# Altium PCB LM-CT-001.PcbDoc
Units mm, origin at the board's own origin, x right, y up, seen from the top; angles counter-clockwise.
Board outline 15 x 52.8 mm, 5 copper layers (Top Layer, Guard, +5, GND, Bottom Layer), stack 0.941 mm thick; 51 components, 43 nets, 200 pads, 13 vias.
Unrouted connection lines stored in the file: 86.
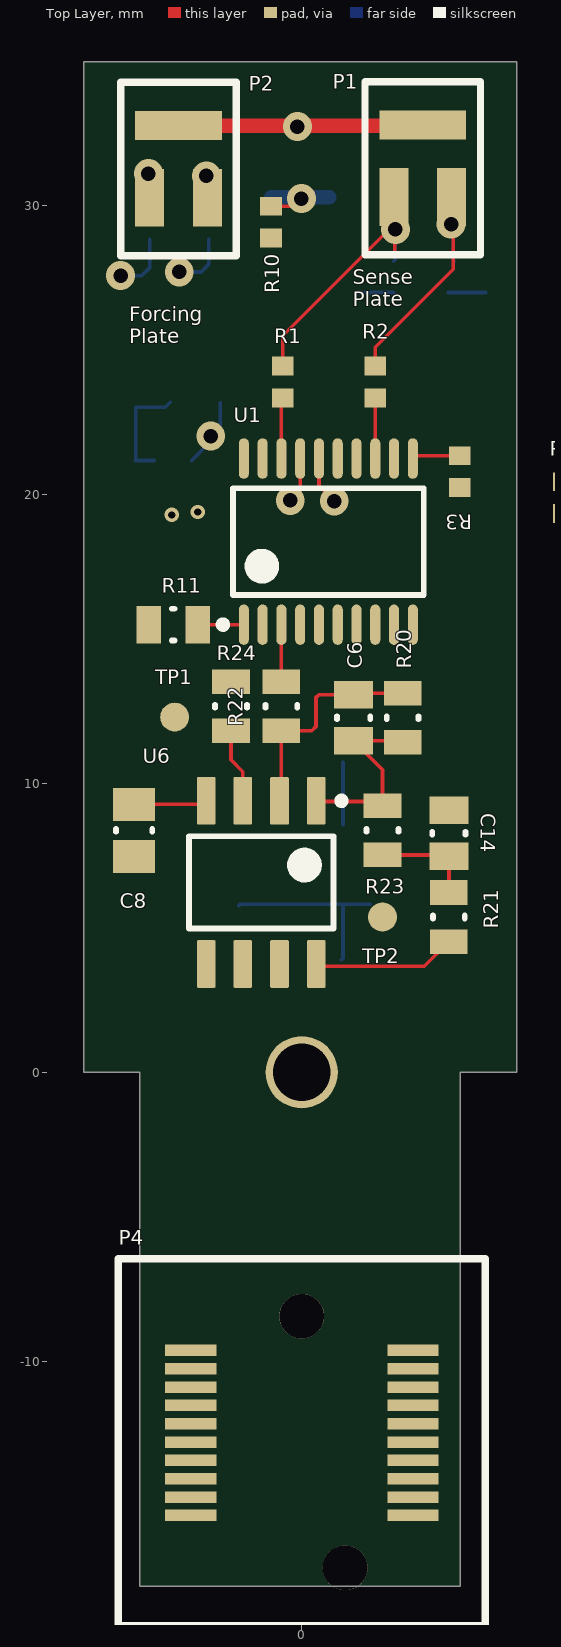
[diagram p0: Top Layer view]
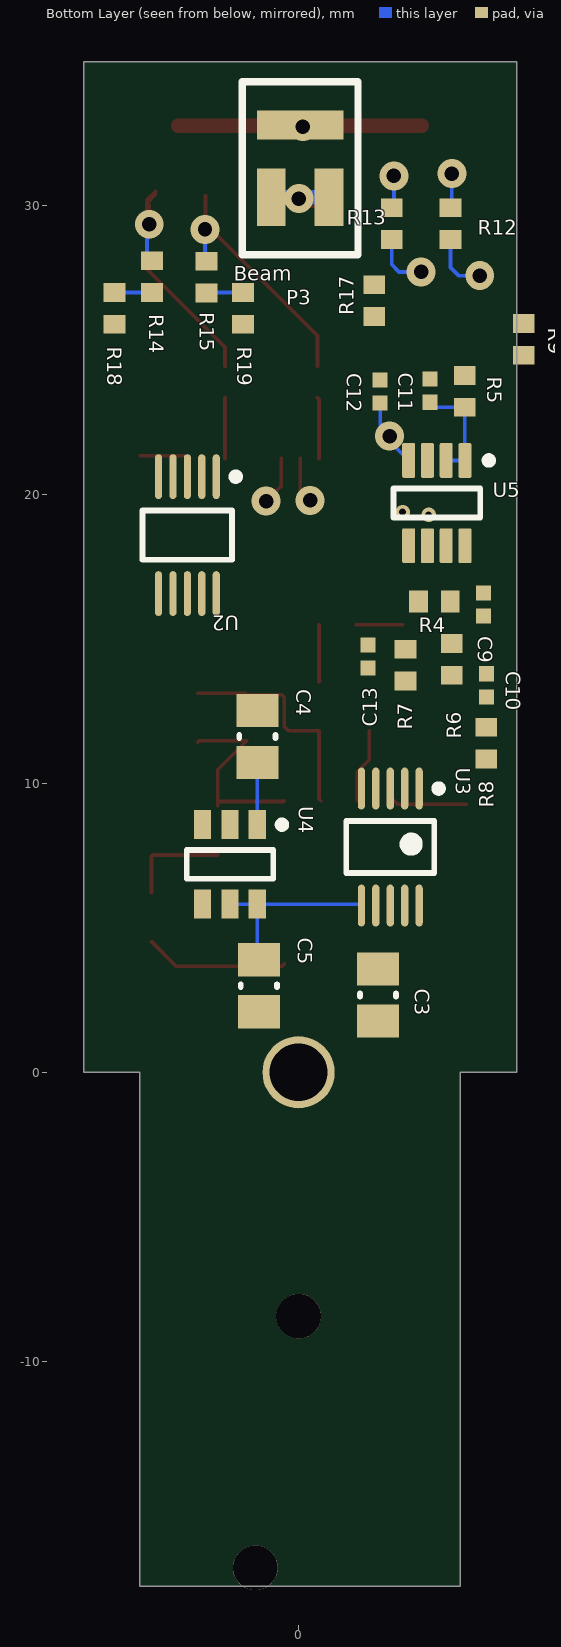
[diagram p1: Bottom Layer view, seen from below]
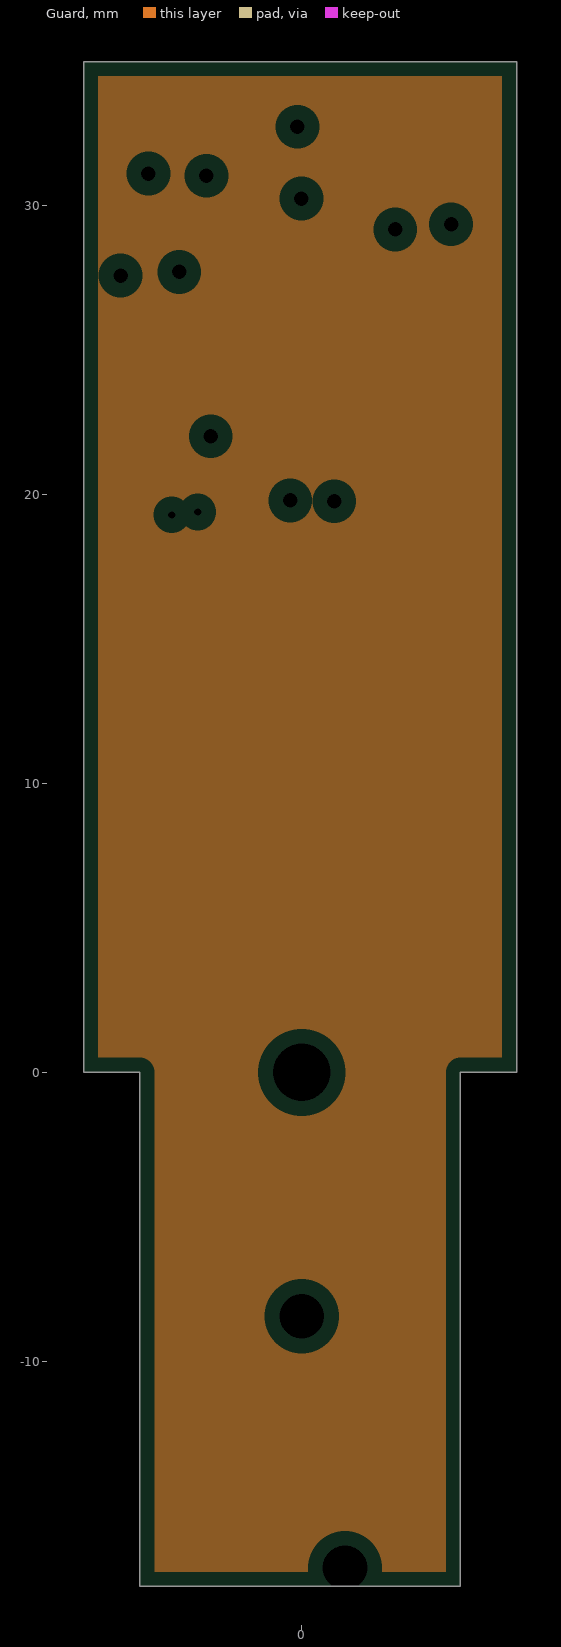
[diagram p2: Guard, clearances drawn from the general rule]
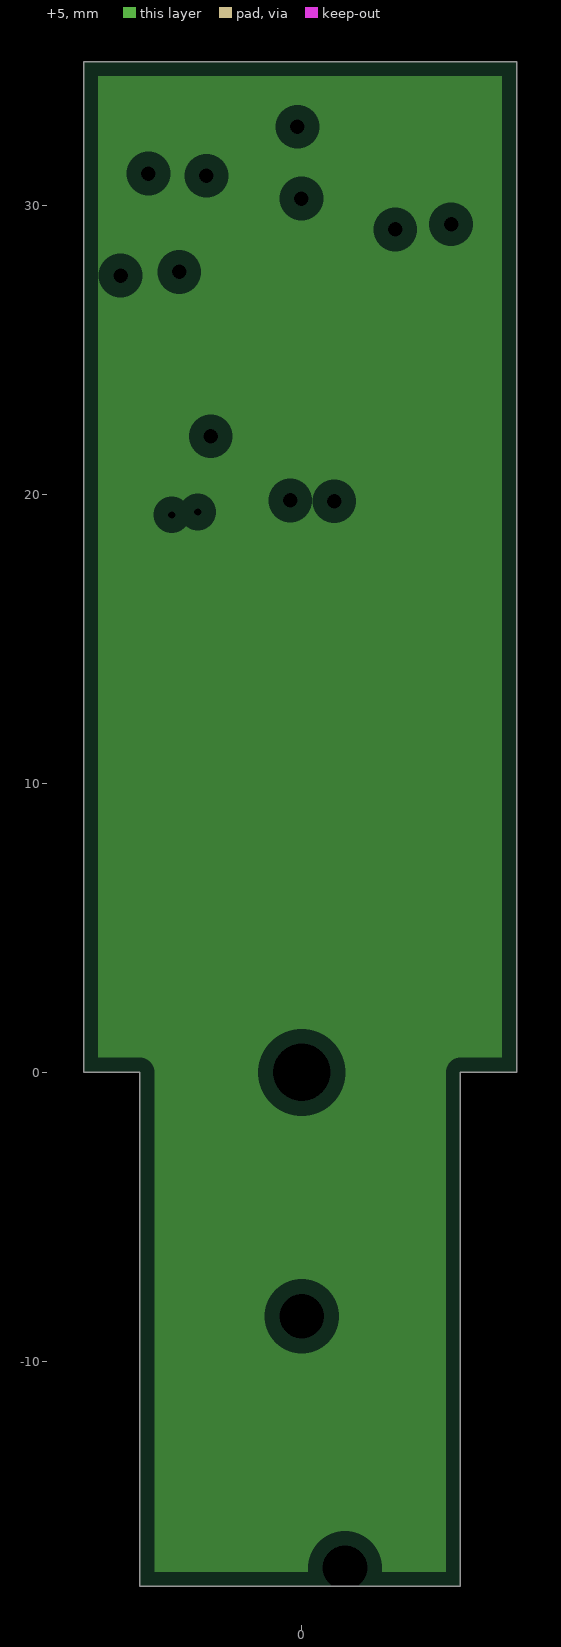
[diagram p3: +5, clearances drawn from the general rule]
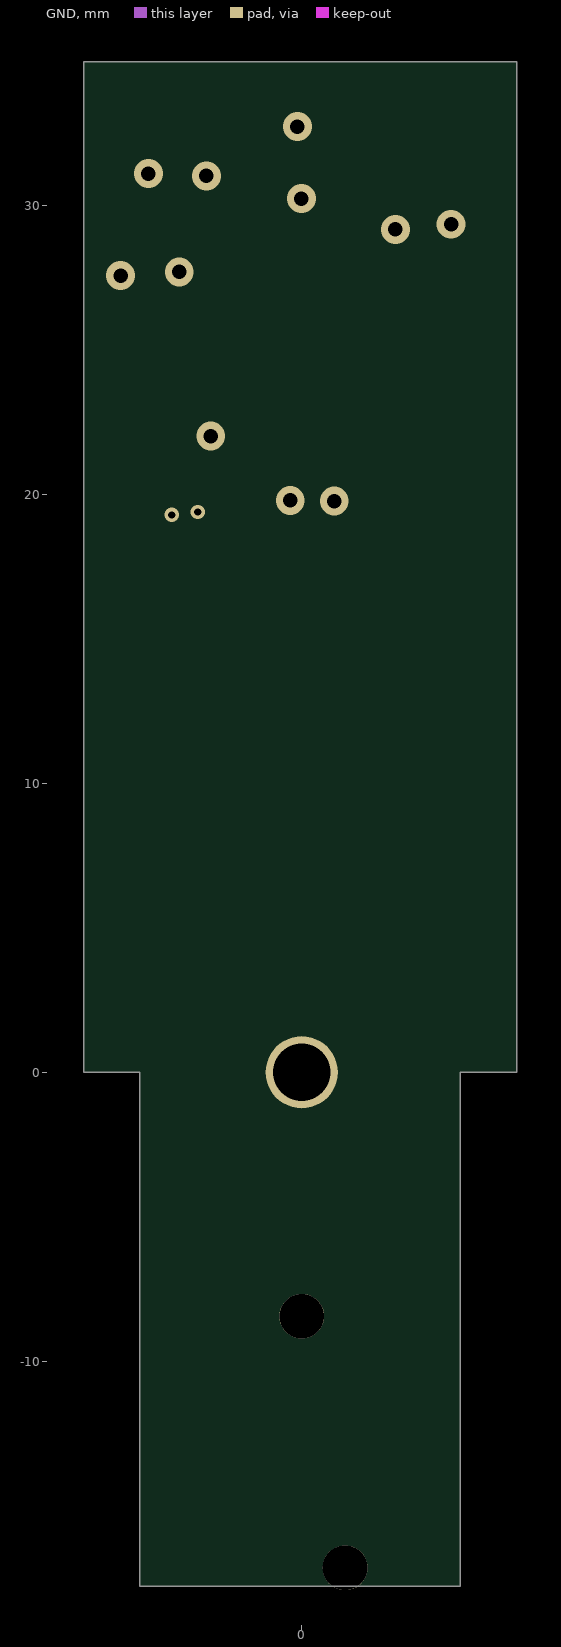
[diagram p4: GND]

## Layer stack, top to bottom
Top Solder: solder mask 0.0102, Solder Resist, Dk 3.5
Top Layer: signal copper 0.0356
Dielectric 1: core 0.254, FR-4, Dk 4.2
Guard: plane copper 0.036
Dielectric 4: prepreg 0.127, Dk 4.2
+5: plane copper 0.036, net +5
Dielectric 3: core 0.254, Dk 4.2
GND: signal copper 0.036
Dielectric 2: prepreg 0.127, Dk 4.2
Bottom Layer: signal copper 0.0356
Bottom Solder: solder mask 0.0102, Solder Resist, Dk 3.5

## Board outline
7.444,0.001 5.494,0.001 5.494,-17.8 -5.606,-17.8 -5.606,0.001 -7.556,0.001 -7.556,34.996 7.444,34.996

## Design rules (kind name [scope] priority, off if disabled: settings)
Clearance [All] p1: gap=0.127 ignorepadtopadclearanceinfootprint=FALSE except(0: Arc-Hole Track-Hole SMDPad-Hole THPad-Hole Via-Hole Fill-Hole Poly-Hole Region-Hole Text-Hole)
HoleToHoleClearance [All] p1: gap=0.127 allowstackedmicrovias=TRUE
MinimumSolderMaskSliver [All] p1: minsoldermaskwidth=0.127
PlaneClearance [All] p1: clearance=0.508
PlaneConnect [All] p1: planeconnectstyle=Relief reliefexpansion=0.508 reliefentries=4 reliefconductorwidth=0.254 reliefairgap=0.254
PolygonConnect [All] p1: connectstyle=Relief reliefconductorwidth=0.254 reliefentries=4 polygonreliefangle="90 Angle" airgapwidth=0.254
RoutingVias [All] p1: holewidth=0.254 width=0.508 viastyle="Through Hole" minholewidth=0.127 minwidth=0.254 maxholewidth=0.711 maxwidth=1.27
SilkToSolderMaskClearance [IsPad] p1: minsilkscreentomaskgap=0.127 clearancetoexposedcopper=TRUE
SolderMaskExpansion [All] p1: expansion=0.102
Width [All] p1: maxlimit=0.254 minlimit=0.127 preferedwidth=0.254 toplayer_prefwidth=0.127 bottomlayer_prefwidth=0.127 minimp=50.000000 maximp=50.000000 favimp=50.000000
25 further rules are at their usual default settings.

## Classes and differential pairs
component class Beam_Amp: C9 C10 C11 C12 C13 P1 P2 P3 P4 R1 R2 R3 R4 R5 R6 R7 R8 R9 R10 R11 TP1 U1 U5
component class ADC: C1 C2 C3 C4 C5 R12 R13 R14 R15 R16 R17 R18 R19 U2 U3 U4
component class Synch_Demod: C6 C7 C8 C14 R20 R21 R22 R23 R24 TP2 U6

## Components (designator, comment, footprint, x,y, rotation, side; value= is the part's Value field where it differs from the comment)
"32 Bit ADC" "Comment" TSSOP-28_M -14.884,10.744 r0 bottom
C1 "CAP CER 0.1UF 25V X7R 0805" CAPC0805(2012)145_N 10.7,11.1 r0 top
C2 "CAP CER 0.1UF 25V X7R 0805" CAPC0805(2012)145_N 10.7,14.2 r0 top
C3 "CAP CER 0.1UF 25V X7R 0805" CAPC0805(2012)145_N -2.75,2.675 r270 bottom
C4 "CAP CER 0.1UF 25V X7R 0805" CAPC0805(2012)145_N 1.425,11.625 r270 bottom
C5 "CAP CER 0.1UF 25V X7R 0805" CAPC0805(2012)145_N 1.375,3 r270 bottom
C6 "470nF" CAPC0805(2012)75_L 1.794,12.276 r270 top
C7 "CAP CER 0.1UF 25V X7R 0805" CAPC0805(2012)145_N 10.7,7.9 r0 top
C8 "CAP CER 0.1UF 25V X7R 0805" CAPC0805(2012)145_N -5.806,8.376 r270 top
C9 "0.1uF" CAPC0402(1005)60_L -6.4,16.2 r90 bottom
C10 "0.1uF" CAPC0402(1005)60_L -6.5,13.4 r270 bottom
C11 "0.1uF" CAPC0402(1005)60_L -4.55,23.6 r90 bottom
C12 "0.1uF" CAPC0402(1005)60_L -2.825,23.575 r270 bottom
C13 "1uF" CAPC0402(1005)60_L -2.4,14.4 r90 bottom
C14 "22uF" CAPC0805(2012)75_L 5.094,8.276 r270 top
P1 "Triax_Conn" Triax_Conn 3.189,30.302 r0 top
P2 "Triax_Conn" Triax_Conn -5.27,30.277 r0 top
P3 "Triax_Conn" Triax_Conn 0.944,30.301 r180 bottom
P4 "MEC6-110-0-PCB" MEC6-110-02-L-DV 0,-12.8 r90 top
R1 "100k" RESC0402(1005)_M -0.656,23.901 r270 top
R2 "100k" RESC0402(1005)_M 2.544,23.901 r270 top
R3 "3.9K" RESC0402(1005)_M 5.475,20.8 r90 top
R4 "" RESC0402(1005)_M -4.7,16.3 r0 bottom
R5 "100" RESC0402(1005)_M -5.75,23.575 r90 bottom
R6 "" RESC0402(1005)_M -5.3,14.3 r90 bottom
R7 "" RESC0402(1005)_M -3.7,14.1 r270 bottom
R8 "" RESC0402(1005)_M -6.5,11.4 r270 bottom
R9 "" RESC0402(1005)_M -7.8,25.375 r90 bottom
R10 "" RESC0402(1005)_M -1.067,29.439 r90 top
R11 "0" RESC0805(2012)_L -4.456,15.501 r0 top
R12 "100K" RESC0402(1005)_M -5.258,29.388 r90 bottom
R13 "100K" RESC0402(1005)_M -3.226,29.388 r90 bottom
R14 "100K" RESC0402(1005)_M 5.075,27.55 r90 bottom
R15 "100K" RESC0402(1005)_M 3.189,27.534 r90 bottom
R16 "10K" RESC0402(1005)_M 9.075,19.9 r90 top
R17 "10K" RESC0402(1005)_M -2.616,26.721 r90 bottom
R18 "10K" RESC0402(1005)_M 6.375,26.45 r90 bottom
R19 "10K" RESC0402(1005)_M 1.925,26.45 r90 bottom
R20 "300K" RESC0805(2012)_L 3.494,12.276 r90 top
R21 "499K" RESC0805(2012)_L 5.094,5.376 r270 top
R22 "18.2K" RESC0805(2012)_L -0.706,12.676 r90 top
R23 "249K" RESC0805(2012)_L 2.794,8.376 r90 top
R24 "33K" RESC0805(2012)_L -2.45,12.675 r270 top
TP1 "TP-SM-C-100" TP-SM-C-100 -4.4,12.3 r0 top
TP2 "TP-SM-C-100" TP-SM-C-100 2.794,5.376 r90 top
U1 "MAX333CWP+" TSOP65P640X90-20N 0.919,18.376 r90 top
U2 "ADG704BRMZ" ADI-RM-10_L 3.85,18.6 r270 bottom
U3 "MAX11100EUB+T" U10+2_L -3.175,7.8 r270 bottom
U4 "MAX6070AAUT41+T" SOT95P280X445-6N 2.375,7.2 r270 bottom
U5 "OPA2378AIDCNT" DCN0008A_M -4.787,19.71 r270 bottom
U6 "LPC662AIM" D0008A_M -1.406,6.576 r270 top

## Footprints (in the part's own frame and the unit in brackets; to place one, negate y for a bottom-side part, rotate by r counter-clockwise, add the part's x,y. Pads: shape width x height; smd on the part's side, far side on the other; paste and mask are expansions set on the pad)
ADI-RM-10_L [mm] "SOP, 10-Leads, Body 3x3mm, Pitch 0.5mm, IPC High Density"
  oval 1.55x0.25 smd: 1(-2.025,1) 2(-2.025,0.5) 3(-2.025,0) 4(-2.025,-0.5) 5(-2.025,-1) 6(2.025,-1) 7(2.025,-0.5) 8(2.025,0) 9(2.025,0.5) 10(2.025,1)
  silkscreen extent -2.15,-1.55 0.85,1.8, body extent -1.55,-1.55 1.55,1.55, height 1.1
CAPC0402(1005)60_L [mm] "Chip Capacitor, Body 1.0x0.5mm, Height 0.6mm, IPC High Density"
  rect 0.52x0.52 smd: 1(-0.4,0) 2(0.4,0)
  body extent -0.55,-0.3 0.55,0.3, height 0.6
CAPC0805(2012)75_L [mm] "Chip Capacitor, Body 2.0x1.2mm, Height 0.75mm, IPC High Density"
  rect 0.95x1.35 smd: 1(-0.8,0) 2(0.8,0)
  silkscreen extent -0.05,-0.58 0.05,0.58, body extent -1.1,-0.72 1.1,0.72, height 0.75
CAPC0805(2012)145_N [mm] "Chip Capacitor, Body 2.0x1.2mm, Height 1.45mm, IPC Medium Density"
  rect 1.15x1.45 smd: 1(-0.9,0) 2(0.9,0)
  silkscreen extent -0.05,-0.62 0.05,0.63, body extent -1.1,-0.72 1.1,0.73, height 1.45
D0008A_M [mm] "SOIC, 8-Leads, Body 5x4mm, Pitch 1.27mm, IPC Low Density"
  rrect15% 1.65x0.65 smd: 1(-2.825,1.905) 2(-2.825,0.635) 3(-2.825,-0.635) 4(-2.825,-1.905) 5(2.825,-1.905) 6(2.825,-0.635) 7(2.825,0.635) 8(2.825,1.905)
  silkscreen extent -2.95,-2.5 1.6,2.91, body extent -3,-2.45 3,2.45, height 1.63
DCN0008A_M [mm] "SOT23, 8-Leads, Body 3x1.75mm, Pitch 0.65mm, IPC Low Density"
  rrect22% 1.2x0.45 smd: 1(-1.475,0.975) 2(-1.475,0.325) 3(-1.475,-0.325) 4(-1.475,-0.975) 5(1.475,-0.975) 6(1.475,-0.325) 7(1.475,0.325) 8(1.475,0.975)
  silkscreen extent -1.6,-1.5 0.5,1.92, body extent -0.88,-1.5 0.87,1.5, height 1.45
MEC6-110-02-L-DV [mm] "Edge Connector Socket"
  rect 0.399x1.781 smd: A1(-2.54,3.85) A2(-1.905,3.85) A3(-1.27,3.85) A4(-0.635,3.85) A5(0,3.85) A6(0.635,3.85) A7(1.27,3.85) A8(1.905,3.85) A9(2.54,3.85) A10(3.175,3.85) B1(-2.54,-3.85) B2(-1.905,-3.85) B3(-1.27,-3.85) B4(-0.635,-3.85) B5(0,-3.85) B6(0.635,-3.85) B7(1.27,-3.85) B8(1.905,-3.85) B9(2.54,-3.85) B10(3.175,-3.85)
  round 1.55 hole 1.55: ""(-4.356,-1.5) ""(4.356,0)
  silkscreen extent -6.35,-6.35 6.35,6.35, body extent -5.2,-4.39 5.92,4.41, height 8.5
RESC0402(1005)_M [mm] "Chip Resistor, Body 1.0x0.5mm, IPC Low Density"
  rect 0.65x0.75 smd: 1(-0.55,0) 2(0.55,0)
  body extent -0.52,-0.28 0.53,0.28, height 0.4
RESC0805(2012)_L [mm] "Chip Resistor, Body 2.0x1.3mm, IPC High Density"
  rect 0.85x1.3 smd: 1(-0.85,0) 2(0.85,0)
  silkscreen extent -0.05,-0.55 0.05,0.55, body extent -1.1,-0.67 1.1,0.68, height 0.7
SOT95P280X445-6N [mm] "SOT23, 6-Leads, Body 2.90x2.80mm, Pitch 0.95mm, IPC Medium Density"
  rect 1x0.6 smd: 1(-1.375,0.95) 2(-1.375,0) 3(-1.375,-0.95) 4(1.375,-0.95) 5(1.375,0) 6(1.375,0.95)
  silkscreen extent -1.5,-1.5 0.5,1.92, body extent -2.11,-1.78 2.11,1.73, height 1.08
TP-SM-C-100 [mm] "Test Point, Surface Mounting, Circular, Pad Diameter 1mm"
  round 1 smd: 1(0,0)
Triax_Conn [mm] "Triaxial pads for Conning Tower"
  rect 1x2 smd: 1(0,0) 2(2,0)
  rect 3x1 smd: 3(1,2.5)
  silkscreen extent -1,-2 3,4
TSOP65P640X90-20N [mm] "TSOP, 20-Leads, Body 6.50x4.40mm, Pitch 0.65mm, IPC Medium Density"
  oval 1.4x0.35 smd: 1(-2.875,2.925) 2(-2.875,2.275) 3(-2.875,1.625) 4(-2.875,0.975) 5(-2.875,0.325) 6(-2.875,-0.325) 7(-2.875,-0.975) 8(-2.875,-1.625) 9(-2.875,-2.275) 10(-2.875,-2.925) 11(2.875,-2.925) 12(2.875,-2.275) 13(2.875,-1.625) 14(2.875,-0.975) 15(2.875,-0.325) 16(2.875,0.325) 17(2.875,0.975) 18(2.875,1.625) 19(2.875,2.275) 20(2.875,2.925)
  silkscreen extent -3,-3.3 1.85,3.77, body extent -2.25,-3.3 2.25,3.3, height 0.9
TSSOP-28_M [mm] "SOP, 28-Leads, Body 9.7x4.4mm, Pitch 0.65mm, IPC Low Density"
  oval 2x0.35 smd: 1(-2.9,4.225) 2(-2.9,3.575) 3(-2.9,2.925) 4(-2.9,2.275) 5(-2.9,1.625) 6(-2.9,0.975) 7(-2.9,0.325) 8(-2.9,-0.325) 9(-2.9,-0.975) 10(-2.9,-1.625) 11(-2.9,-2.275) 12(-2.9,-2.925) 13(-2.9,-3.575) 14(-2.9,-4.225) 15(2.9,-4.225) 16(2.9,-3.575) 17(2.9,-2.925) 18(2.9,-2.275) 19(2.9,-1.625) 20(2.9,-0.975) 21(2.9,-0.325) 22(2.9,0.325) 23(2.9,0.975) 24(2.9,1.625) 25(2.9,2.275) 26(2.9,2.925) 27(2.9,3.575) 28(2.9,4.225)
  silkscreen extent -3.02,-4.9 1.5,5.07, body extent -2.25,-4.9 2.25,4.9, height 1.2
U10+2_L [mm] "TSSOP, 10-Leads, Body 3x3mm, Pitch 0.5mm, IPC High Density"
  oval 1.45x0.25 smd: 1(-2.025,1) 2(-2.025,0.5) 3(-2.025,0) 4(-2.025,-0.5) 5(-2.025,-1) 6(2.025,-1) 7(2.025,-0.5) 8(2.025,0) 9(2.025,0.5) 10(2.025,1)
  silkscreen extent -2.15,-1.52 0.9,1.8, body extent -1.55,-1.55 1.55,1.55, height 1.1

## Part data
C1 C2 C3 C4 C5 C7 C8: library part CMP-1036-04795-1, Capacitance=0.1µF, Manufacturer="Murata Electronics North America", Manufacturer Part Number=GRM21BR71E104KA01L, Operating Temperature="-55°C ~ 125°C", Package / Case="0805 (2012 Metric)", Ratings=-, Supplier Part Number 1=490-1673-6-ND, Temperature Coefficient=X7R, Tolerance=±10%, Voltage - Rated=25V, Applications="General Purpose", Category=Capacitors, ComponentLink1Description=http://www.murata.com/~/media/webrenewal/support/library/catalog/products/capacitor/mlcc/c02e.ashx, ComponentLink1URL=http://www.murata.com/~/media/webrenewal/support/library/catalog/products/capacitor/mlcc/c02e.ashx, Features=-, Height - Seated (Max)=-, Lead Spacing=-, Lead Style=-, Mounting Type="Surface Mount, MLCC", Packaging=Digi-Reel®, Part Status=Active, Pricing 1="1=0.2, 10=0.145, 100=0.0683, 500=0.04788, 1000=0.03964 (USD)", RoHS="RoHS Compliant", Size / Dimension="0.079\" L x 0.049\" W (2.00mm x 1.25mm)", Stock 1=891652, Supplier 1=Digi-Key, Thickness (Max)="0.053\" (1.35mm)"
C6: library part CMP-1036-02117-1, "CAP CER 0.47UF 25V X7R 0805", Manufacturer="Murata Electronics North America", Manufacturer Part Number=GRM219R71E474KA88D, Operating Temperature="-55°C ~ 125°C", Package / Case="0805 (2012 Metric)", Ratings=-, Supplier Part Number 1=490-11584-1-ND, Temperature Coefficient=X7R, Tolerance=±10%, Voltage - Rated=25V, Applications="General Purpose", Category=Capacitors, ComponentLink1Description=https://www.murata.com/~/media/webrenewal/support/library/catalog/products/capacitor/mlcc/c02e.ashx?la=en-us, ComponentLink1URL=https://www.murata.com/~/media/webrenewal/support/library/catalog/products/capacitor/mlcc/c02e.ashx?la=en-us, Features=-, Height - Seated (Max)=-, Lead Spacing=-, Lead Style=-, Mounting Type="Surface Mount, MLCC", Packaging="Cut Tape (CT)", Part Status=Active, Pricing 1="1=0.38, 10=0.262, 100=0.1573, 500=0.118, 1000=0.09964 (USD)", RoHS="RoHS Compliant", Size / Dimension="0.079\" L x 0.049\" W (2.00mm x 1.25mm)", Stock 1=410, Supplier 1=Digi-Key, Thickness (Max)="0.037\" (0.95mm)"
C9 C10 C11 C12 C13: library part CMP-1034-00252-1, "CAP CER 0.1UF 10V X7R 0402", Manufacturer="Murata Electronics North America", Manufacturer Part Number=GRM155R71A104KA01D, Operating Temperature="-55°C ~ 125°C", Package / Case="0402 (1005 Metric)", Ratings=-, Supplier Part Number 1=490-6321-1-ND, Temperature Coefficient=X7R, Tolerance=±10%, Voltage - Rated=10V, Applications="General Purpose", Category=Capacitors, ComponentLink1Description=http://www.murata.com/~/media/webrenewal/support/library/catalog/products/capacitor/mlcc/c02e.ashx?la=en-us, ComponentLink1URL=http://www.murata.com/~/media/webrenewal/support/library/catalog/products/capacitor/mlcc/c02e.ashx?la=en-us, Features=-, Height - Seated (Max)=-, Lead Spacing=-, Mounting Type="Surface Mount, MLCC", Packaging="Cut Tape (CT)", Part Status=Active, Pricing 1="1=0.1, 10=0.014, 100=0.0063, 500=0.00446, 1000=0.00351, 2500=0.00319, 5000=0.00293 (USD)", RoHS="RoHS Compliant", Size / Dimension="0.039\" L x 0.020\" W (1.00mm x 0.50mm)", Stock 1=2920395, Supplier 1=Digi-Key, Thickness (Max)="0.022\" (0.55mm)"
C14: library part CMP-1036-02117-1, "CAP CER 22UF 25V X5R 0805", Manufacturer="Murata Electronics North America", Manufacturer Part Number=GRM21BR61E226ME44L, Operating Temperature="-55°C ~ 85°C", Package / Case="0805 (2012 Metric)", Ratings=-, Supplier Part Number 1=490-10749-1-ND, Temperature Coefficient=X5R, Tolerance=±20%, Voltage - Rated=25V, Applications="General Purpose", Category=Capacitors, ComponentLink1Description=http://search.murata.co.jp/Ceramy/image/img/A01X/G101/ENG/GRM21BR61E226ME44-01.pdf, ComponentLink1URL=http://search.murata.co.jp/Ceramy/image/img/A01X/G101/ENG/GRM21BR61E226ME44-01.pdf, Features=-, Height - Seated (Max)=-, Lead Spacing=-, Lead Style=-, Mounting Type="Surface Mount, MLCC", Notification="Current market demand for these product types have resulted in fluctuating and extending lead times. Lead times may differ.", Packaging="Cut Tape (CT)", Part Status=Active, Pricing 1="1=0.57, 10=0.404, 100=0.2663, 500=0.19722, 1000=0.16764 (USD)", RoHS="RoHS Compliant", Size / Dimension="0.079\" L x 0.049\" W (2.00mm x 1.25mm)", Stock 1=2004, Supplier 1=Digi-Key, Thickness (Max)="0.057\" (1.45mm)"
R1 R2: library part CMP-1011-00651-1
R3 R4 R5 R6 R7 R8 R9 R10 R12 R13 R14 R15 R16 R17 R18 R19: library part CMP-1011-00463-1
R11: library part CMP-1013-00215-1, "RES SMD 0 OHM JUMPER 1/8W 0805", Manufacturer="Panasonic Electronic Components", Manufacturer Part Number=ERJ-6GEY0R00V, Operating Temperature="-55°C ~ 155°C", Package / Case="0805 (2012 Metric)", Power (Watts)="0.125W, 1/8W", Supplier Device Package=0805, Supplier Part Number 1=P0.0ACT-ND, Temperature Coefficient=-, Tolerance=Jumper, Category=Resistors, ComponentLink1Description=http://industrial.panasonic.com/www-cgi/jvcr13pz.cgi?E+PZ+3+AOA0001+ERJ6GEY0R00V+7+WW, ComponentLink1URL=http://industrial.panasonic.com/www-cgi/jvcr13pz.cgi?E+PZ+3+AOA0001+ERJ6GEY0R00V+7+WW, Composition="Thick Film", Failure Rate=-, Features="Automotive AEC-Q200", Height - Seated (Max)="0.028\" (0.70mm)", Packaging="Cut Tape (CT)", Part Status=Active, Pricing 1="1=0.1, 10=0.074, 25=0.0532, 50=0.0406, 100=0.03, 250=0.02288, 500=0.0183, 1000=0.01347 (USD)", RoHS="RoHS Compliant", Size / Dimension="0.079\" L x 0.049\" W (2.00mm x 1.25mm)", Stock 1=3414819, Supplier 1=Digi-Key
R20: library part CMP-1013-00215-1, "RES SMD 300K OHM 1% 1/8W 0805", Manufacturer="Vishay Dale", Manufacturer Part Number=CRCW0805300KFKEAHP, Operating Temperature="-55°C ~ 155°C", Package / Case="0805 (2012 Metric)", Power (Watts)="0.5W, 1/2W", Supplier Device Package=0805, Supplier Part Number 1=541-300KTCT-ND, Temperature Coefficient=±100ppm/°C, Tolerance=±1%, Category=Resistors, ComponentLink1Description=http://www.vishay.com/docs/20043/crcwhpe3.pdf, ComponentLink1URL=http://www.vishay.com/docs/20043/crcwhpe3.pdf, Composition="Thick Film", Failure Rate=-, Features="Automotive AEC-Q200, Pulse Withstanding", Height - Seated (Max)="0.020\" (0.50mm)", Packaging="Cut Tape (CT)", Part Status=Active, Pricing 1="1=0.28, 10=0.233, 100=0.0911, 1000=0.03812, 2500=0.03494 (USD)", RoHS="RoHS Compliant", Size / Dimension="0.079\" L x 0.049\" W (2.00mm x 1.25mm)", Stock 1=3851, Supplier 1=Digi-Key
R21: library part CMP-1013-00215-1, "RES SMD 499K OHM 0.1% 1/8W 0805", Manufacturer="Panasonic Electronic Components", Manufacturer Part Number=ERA-6AEB4993V, Operating Temperature="-55°C ~ 155°C", Package / Case="0805 (2012 Metric)", Power (Watts)="0.125W, 1/8W", Supplier Device Package=0805, Supplier Part Number 1=P499KDACT-ND, Temperature Coefficient=±25ppm/°C, Tolerance=±0.1%, Category=Resistors, ComponentLink1Description=https://industrial.panasonic.com/cdbs/www-data/pdf/RDM0000/AOA0000C307.pdf, ComponentLink1URL=https://industrial.panasonic.com/cdbs/www-data/pdf/RDM0000/AOA0000C307.pdf, Composition="Thin Film", Failure Rate=-, Features="Automotive AEC-Q200", Height - Seated (Max)="0.024\" (0.60mm)", Packaging="Cut Tape (CT)", Part Status=Active, Pricing 1="1=0.36, 10=0.302, 100=0.1182, 1000=0.04948, 2500=0.04536 (USD)", RoHS="RoHS Compliant", Size / Dimension="0.079\" L x 0.049\" W (2.00mm x 1.25mm)", Stock 1=125602, Supplier 1=Digi-Key
R22: library part CMP-1013-00215-1, "RES SMD 18.2K OHM 1% 1/8W 0805", Manufacturer="Panasonic Electronic Components", Manufacturer Part Number=ERJ-6ENF1822V, Operating Temperature="-55°C ~ 155°C", Package / Case="0805 (2012 Metric)", Power (Watts)="0.125W, 1/8W", Supplier Device Package=0805, Supplier Part Number 1=P18.2KCCT-ND, Temperature Coefficient=±100ppm/°C, Tolerance=±1%, Category=Resistors, ComponentLink1Description=https://industrial.panasonic.com/cdbs/www-data/pdf/RDA0000/AOA0000C304.pdf, ComponentLink1URL=https://industrial.panasonic.com/cdbs/www-data/pdf/RDA0000/AOA0000C304.pdf, Composition="Thick Film", Failure Rate=-, Features="Automotive AEC-Q200", Height - Seated (Max)="0.028\" (0.70mm)", Packaging="Cut Tape (CT)", Part Status=Active, Pricing 1="1=0.1, 10=0.079, 100=0.0305, 1000=0.0134, 2500=0.01157 (USD)", RoHS="RoHS Compliant", Size / Dimension="0.079\" L x 0.049\" W (2.00mm x 1.25mm)", Stock 1=116820, Supplier 1=Digi-Key
R23: library part CMP-1013-00215-1, "RES SMD 249K OHM 0.1% 1/8W 0805", Manufacturer="Panasonic Electronic Components", Manufacturer Part Number=ERA-6AEB2493V, Operating Temperature="-55°C ~ 155°C", Package / Case="0805 (2012 Metric)", Power (Watts)="0.125W, 1/8W", Supplier Device Package=0805, Supplier Part Number 1=P249KDACT-ND, Temperature Coefficient=±25ppm/°C, Tolerance=±0.1%, Category=Resistors, ComponentLink1Description=https://industrial.panasonic.com/cdbs/www-data/pdf/RDM0000/AOA0000C307.pdf, ComponentLink1URL=https://industrial.panasonic.com/cdbs/www-data/pdf/RDM0000/AOA0000C307.pdf, Composition="Thin Film", Failure Rate=-, Features="Automotive AEC-Q200", Height - Seated (Max)="0.024\" (0.60mm)", Packaging="Cut Tape (CT)", Part Status=Active, Pricing 1="1=0.36, 10=0.302, 100=0.1182, 1000=0.04948, 2500=0.04536 (USD)", RoHS="RoHS Compliant", Size / Dimension="0.079\" L x 0.049\" W (2.00mm x 1.25mm)", Stock 1=18568, Supplier 1=Digi-Key
R24: library part CMP-1013-00215-1, "RES SMD 33K OHM 1% 1/2W 0805", Manufacturer="Vishay Dale", Manufacturer Part Number=CRCW080533K0FKEAHP, Operating Temperature="-55°C ~ 155°C", Package / Case="0805 (2012 Metric)", Power (Watts)="0.5W, 1/2W", Supplier Device Package=0805, Supplier Part Number 1=541-33.0KTCT-ND, Temperature Coefficient=±100ppm/°C, Tolerance=±1%, Category=Resistors, ComponentLink1Description=http://www.vishay.com/docs/20043/crcwhpe3.pdf, ComponentLink1URL=http://www.vishay.com/docs/20043/crcwhpe3.pdf, Composition="Thick Film", Failure Rate=-, Features="Automotive AEC-Q200, Pulse Withstanding", Height - Seated (Max)="0.020\" (0.50mm)", Packaging="Cut Tape (CT)", Part Status=Active, Pricing 1="1=0.28, 10=0.233, 100=0.0911, 1000=0.03812, 2500=0.03494 (USD)", RoHS="RoHS Compliant", Size / Dimension="0.079\" L x 0.049\" W (2.00mm x 1.25mm)", Stock 1=2026, Supplier 1=Digi-Key
TP1 TP2: library part CMP-0484-00002-2, "Test Point, Surface Mount, Circular, Pad Diameter 1 mm", Manufacturer="No Vendor", PartNumber=TP-SM-C-100
U1: "IC SWITCH QUAD SPDT 20TSSOP", Case/Package=TSSOP, Dual Supply Voltage=15V, Manufacturer=Maxim, Manufacturer Part Number=MAX333AEUP+, Max Dual Supply Voltage=20V, Max Operating Temperature=85°C, Max Power Dissipation=559mW, Max Supply Current=250uA, Max Supply Voltage=30V, Min Dual Supply Voltage=4.5V, Min Operating Temperature=-40°C, Min Supply Voltage=10V, On-State Resistance=35R, Operating Supply Current=1uA, Package Quantity=74, Supplier Part Number 1=700-MAX333AEUP, ComponentLink1Description=https://datasheet.ciiva.com/2978/max333a-2978850.pdf, ComponentLink1URL=https://datasheet.ciiva.com/2978/max333a-2978850.pdf, ComponentLink2Description=https://datasheet.ciiva.com/30478/0900766b81253c85-30478260.pdf, ComponentLink2URL=https://datasheet.ciiva.com/30478/0900766b81253c85-30478260.pdf, ComponentLink3Description=https://datasheet.ciiva.com/1674/max333a-1674617.pdf, ComponentLink3URL=https://datasheet.ciiva.com/1674/max333a-1674617.pdf, ComponentLink4Description=https://datasheet.ciiva.com/26825/max333aeup-26825546.pdf, ComponentLink4URL=https://datasheet.ciiva.com/26825/max333aeup-26825546.pdf, Height=0.95mm, Lead Free="Lead Free", Length=6.6mm, Number of Bits=4, Number of Channels=4, Number of Pins=20, Packaging=Rail/Tube, Pricing 1="1=6.77, 10=6.43, 50=5.8, 100=5.8, 1000=5.62, 10000=5.62 (USD)", Radiation Hardening=No, REACH SVHC=Unknown, Stock 1=664, Supplier 1=Mouser, Supply Type=Single,Dual, Throw Configuration=SPDT, Turn-Off Delay Time=145ns, Turn-On Delay Time=175ns, Weight=0.006737oz, Width=4.5mm
U2: library part CMP-0798-00103-1, "CMOS Low Voltage 4 Ohm, 4-Channel Multiplexer, -40 to 85 degC, 10-pin SOP (RM-10), Tube", Manufacturer="Analog Devices", Bandwidth (Hz)=200M, Code_JEDEC=MO-187-BA, ComponentLink1Description="Manufacturer URL", ComponentLink1URL=http://www.analog.com/en/index.html, ComponentLink2Description=Datasheet, ComponentLink2URL=http://www.analog.com/static/imported-files/data_sheets/ADG704.pdf, ComponentLink3Description="Package Specification", ComponentLink3URL=http://www.analog.com/static/imported-files/packages/PKG_PDF/MSOP%28RM%29/RM_10.pdf, DatasheetVersion="Rev. A", Max Analog Signal Range="0 to Vdd", Mounting Technology="Surface Mount", PackageDescription="10-Pin Mini Small Outline Package, Body 3 x 3 mm, Pitch 0.5 mm", PackageReference=RM-10, PackageVersion=Aug-05, Packing=Tube, PartNumber=ADG704BRMZ, Ron (ohms)=4, Supply V Guar Performance="Single_(+3.3V), Single_(+3V), Single_(+5V)"
U3: library part CMP-0249-00017-1, "16-Bit, +5V, 200ksps ADC with 10uA Shutdown, 10-Pin uMAX, -40°C to +85°C, Pb-Free, Tape and Reel", Base Part Number=MAX11100, Manufacturer="Maxim Integrated", Manufacturer Part Number=MAX11100EUB+, Operating Temperature="-40°C ~ 85°C", Package / Case="10-TFSOP, 10-MSOP (0.118\", 3.00mm Width)", Supplier Device Package=10-uMAX, Supplier Part Number 1=MAX11100EUB+-ND, Voltage - Supply, Analog=5V, Voltage - Supply, Digital="2.7 V ~ 5.25 V", Architecture=SAR, Category="Integrated Circuits (ICs)", ComponentLink1Description=https://datasheets.maximintegrated.com/en/ds/MAX11100.pdf, ComponentLink1URL=https://datasheets.maximintegrated.com/en/ds/MAX11100.pdf, Configuration=S/H-ADC, Data Interface=SPI, Features=-, Input Type="Single Ended", Number of Bits=16, Number of Inputs=1, Packaging=Tube, Part Status=Active, Pricing 1="1=5.98, 10=5.855 (USD)", Ratio - S/H:ADC=1:1, Reference Type=External, RoHS="RoHS Compliant", Sampling Rate (Per Second)=200k, Stock 1=927, Supplier 1=Digi-Key
U4: "IC VREF SERIES 4.096V SOT23", Current - Supply=350µA, Manufacturer="Maxim Integrated", Operating Temperature="-40°C ~ 125°C (TA)", Package / Case=SOT-23-6, Supplier Part Number 1=MAX6070AAUT41+TCT-ND, Temperature Coefficient=6ppm/°C, Tolerance=±0.04%, Voltage - Input="4.3 V ~ 5.5 V", Voltage - Output (Min/Fixed)=4.096V, Category="Integrated Circuits (ICs)", ComponentLink1Description=https://datasheets.maximintegrated.com/en/ds/MAX6070-MAX6071.pdf, ComponentLink1URL=https://datasheets.maximintegrated.com/en/ds/MAX6070-MAX6071.pdf, Manufacturer Part Number=MAX6070AAUT41+T, Mounting Type="Surface Mount", Noise - 0.1Hz to 10Hz=9.6µVp-p, Noise - 10Hz to 10kHz=9µVrms, Output Type=Fixed, Packaging="Cut Tape (CT)", Part Status=Active, Pricing 1="1=3.41, 10=3.213, 25=2.5704, 50=2.4418, 100=2.2491, 250=2.13344, 500=2.05634 (USD)", Reference Type=Series, RoHS="RoHS Compliant", Stock 1=2623, Supplier 1=Digi-Key, Supplier Device Package=SOT-23-6
U5: library part CMP-0272-01124-3, "Low-Noise, 900 kHz, RRIO, Precision Operational Amplifier, Zero-Drift Series, 2.2 to 5.5 V, -40 to 125 degC, 8-pin SOP (DCN8), Green (RoHS & no Sb/Br)", Manufacturer="Texas Instruments", Total Supply Voltage(Max)(+5V is 5, +/-5V is 10)=5.5, Total Supply Voltage(Min)(+5V is 5, +/-5V is 10)=2.2, CMRR(Min)(dB)=100, Code_JEDEC=MO-178, ComponentLink1Description="Manufacturer URL", ComponentLink1URL=http://www.ti.com/, ComponentLink2Description=Datasheet, ComponentLink2URL=http://www.ti.com/general/docs/lit/getliterature.tsp?genericPartNumber=OPA2378&fileType=pdf, ComponentLink3Description="Package Specification", ComponentLink3URL=http://www.ti.com/lit/ml/mpds099c/mpds099c.pdf, DatasheetVersion=SBOS417D, Eco-Plan="Green (RoHS & no Sb/Br)", IIB(Max)(pA)=550, Iq per channel(Max)(mA)=0.15, Mounting Technology="Surface Mount", Number of Channels=2, Offset Drift(Typ)(uV/C)=0.25, PackageDescription="8-Pin Plastic Small Outline, Body 1.6 x 2.9 mm, Pitch 0.65 mm", PackageReference=DCN0008A, PackageVersion="4202106/D, 11/2009", PartId=1, PartNumber=OPA2378AIDCNT, Slew Rate(Typ)(V/us)=0.4, Sub Family="Low Offset Voltage Amplifier (<=500uV), Low Power Amp (<=500uA), Low Supply Voltage Amplifier (<=2.7V), Precision Amplifier, Zero Drift Precision Amplifier", Vio (25C)(Max)(mV)=0.07, Vn at 1kHz(Typ)(nV/rtHz)=20
U6: library part CMP-0055-00867-3, "Low Power CMOS Dual Operational Amplifier, 8-pin Narrow SOIC", Base Part Number=LPC662, Current - Supply=86µA, Manufacturer="Texas Instruments", Manufacturer Part Number=LPC662AIM/NOPB, Operating Temperature="-40°C ~ 85°C", Package / Case="8-SOIC (0.154\", 3.90mm Width)", Supplier Device Package=8-SOIC, Supplier Part Number 1=LPC662AIM/NOPB-ND, Voltage - Supply, Single/Dual (±)="4.75 V ~ 15.5 V, ±2.38 V ~ 7.75 V", Amplifier Type="General Purpose", Category="Integrated Circuits (ICs)", ComponentLink1Description=http://www.ti.com/lit/ds/symlink/lpc662.pdf, ComponentLink1URL=http://www.ti.com/lit/ds/symlink/lpc662.pdf, Mounting Type="Surface Mount", Output Type=Rail-to-Rail, Packaging=Tube, Part Status=Active, Pricing 1="1=3.4, 95=2.88905, 190=2.50379, 570=2.13144, 1045=1.7976 (USD)", RoHS="RoHS Compliant", Slew Rate="0.11 V/µs", Stock 1=319, Supplier 1=Digi-Key

## Free pads (board coordinates)
  round 2.5 hole 2: 3(0,0)

## Via types
v1: diameter 1, hole 0.5, Top Layer to Bottom Layer, 11 vias
v2: diameter 0.5, hole 0.25, Top Layer to Bottom Layer, 2 vias

## Nets (pads, with @x,y where several pads share a name; then routed paths per layer and width w, separated by ;. In a path a pad name is that pad's centre, name@x,y a point inside that pad or via, vN(x,y) a via of type N, cw(c..) or ccw(c..) an arc to the next point about the centre after c; other vN are vias at no path point)
+3.3: C2.1 U3.3
+5: C1.1 C3.1 C7.1 C9.2 P4.B2 R21.2 U2.5 U2.6 U3.7 U4.3 U4.4 U5.8 U6.8 | length 5
  Top Layer w0.127: U6.8 0.574,3.676 4.244,3.676 R21.2
-5: C8.1 C12.2 P4.A2 U1.5 U5.4 U6.4 | length 4.9
  Top Layer w0.127: C8.1 -3.436,9.276 U6.4
  Bottom Layer w0.127: U5.4 -3.15,21.847 v1(-3.15,22.025) -2.825,22.35 C12.2
A0: P4.B6 U2.1
A1: P4.B7 U2.10
"ADC REF": C5.1 U3.6 U4.5 U4.6 | length 6.5
  Bottom Layer w0.127: U3.6 -2.125,5.825 U4.6 ; C5.1 1.425,3.95 U4.6 ; U4.5 U4.6
ADC_In: U2.8 U3.5
BEAM: C10.2 R8.1 U1.4
"Beam Sync Demod Out": C14.2 R21.1 R23.1 TP2.1 U2.7 | length 3.6
  Top Layer w0.127: R23.1 5.044,7.526 C14.2 R21.1
Beam_In: P3.1 P3.2 R10.2 U5.3 | length 3.2
  Top Layer w0.127: R10.2 -0.275,29.989 v1(-0.012,30.251)
  Bottom Layer w0.5: P3.2 P3.1
Beam_mod: R22.2 U1.3 | length 2
  Top Layer w0.127: R22.2 -0.731,13.551 -0.706,13.576 U1.3
Bottom_Forcing_Plate: P1.2 R2.1 R14.2 | length 9.8
  Top Layer w0.127: R2.1 2.544,25.101 5.246,27.803 5.246,30.2 P1.2@4.944,30.501 ; P1.2@4.944,30.401 5.246,30.1 5.17,30.023 v1(5.17,29.362)
  Bottom Layer w0.127: v1(5.17,29.362) 5.17,28.929 5.246,28.853 5.246,28.109 R14.2@5.271,28.084
FB_CS0: P4.A7 U3.9
GND: C1.2 C2.2 C3.2 C4.1 C5.2 C7.2 C8.2 C9.1 C12.1 C13.1 C14.1 P4.A5 P4.B1 R3.1 R8.2 R9.2 R10.1 R16.1 R17.1 R18.1 R19.1 R24.1 U1.2 U1.6 U1.7 U1.8 U1.9 U1.10 U1.14 U1.19 U2.3 U3.2 U3.4 U3.8 U4.2
Guard: P1.3 P2.3 P3.3 pad.3 R5.2 | length 8.5
  Top Layer w0.127: P1.3@4.163,32.777 P1.3
  Top Layer w0.5: P2.3 P1.3@4.163,32.777
  other v1: -0.152,32.741
NetC4_2: C4.2 U4.1 | length 2.1
  Bottom Layer w0.127: U4.1 C4.2
NetC6_1: C6.1 R20.2 R22.1 U6.2 | length 7.8
  Top Layer w0.127: U6.2 -0.706,9.466 R22.1 0.344,11.826 0.494,11.976 0.494,12.976 0.594,13.076 C6.1 1.844,13.126 R20.2
NetC6_2: C6.2 R20.1 R23.2 U6.1 | length 6.7
  Top Layer w0.127: U6.1 0.524,9.376 R23.2@2.794,9.376 ; R23.2 2.794,10.476 C6.2 3.444,11.476 R20.1
NetC10_1: C10.1 R6.1
NetC11_1: C11.1 R5.1 U5.1 U5.2 | length 3.8
  Bottom Layer w0.127: U5.2 U5.1 -5.75,21.197 R5.1 -4.725,23.025 C11.1
NetC11_2: C11.2 R9.1 U5.5
  other v2: -3.6,19.4
NetC13_2: C13.2 R7.2
NetR1_2: R1.2 U1.18 | length 2.1
  Top Layer w0.127: U1.18 -0.706,23.301 R1.2
NetR2_2: R2.2 U1.13 | length 2.1
  Top Layer w0.127: U1.13 R2.2
NetR3_2: R3.2 U1.11 U1.20 | length 1.7
  Top Layer w0.127: U1.11 3.943,21.35 R3.2
NetR4_1: R4.1 R6.2 R7.1 U5.7
NetR4_2: R4.2 U5.6
  other v2: -4.5,19.3
NetR24_2: R24.2 U6.3 | length 2.6
  Top Layer w0.127: R24.2 -2.45,10.821 -2.041,10.411 U6.3
PLATE_N: P2.2 P4.B3 R13.2 | length 1.1
  Bottom Layer w0.127: v1(-3.302,31.039) -3.302,30.002 R13.2@-3.238,29.938
PLATE_P: P2.1 P4.A3 R12.2 | length 1.2
  Bottom Layer w0.127: v1(-5.309,31.115) -5.309,30.071 R12.2@-5.175,29.938
PWM1A: P4.B5
PWM2B_DELAY: P4.B9 R11.1 TP1.1
S1: R12.1 R16.2 U2.2 | length 2.7
  Bottom Layer w0.127: -5.688,27.584 v1(-6.274,27.584) -5.537,27.584 -5.258,27.864 R12.1
S2: R14.1 R18.2 U2.9 | length 1.3
  Bottom Layer w0.127: R14.1 R18.2
S3: R13.1 R17.2 U2.4 | length 2
  Bottom Layer w0.127: v1(-4.242,27.711) -3.48,27.711 -3.226,27.965 R13.1
S4: R15.1 R19.2 | length 1.3
  Bottom Layer w0.127: R19.2 3.172,27 R15.1
SPI0_MOSI: P4.A8
SPIO_MISO: P4.A9 U3.1
SPIO_SCLK: P4.A10 U3.10
Sync_clk: P4.B10 R11.2 U1.1 | length 1.6
  Top Layer w0.127: R11.2 U1.1
Top_Forcing_Plate: P1.1 R1.1 R15.2 | length 9.3
  Top Layer w0.127: R1.1 -0.656,25.501 v1@2.944,29.101 ; 3.219,28.351 P1.1@3.219,30.351
  Bottom Layer w0.127: R15.2 3.239,28.134 v1(3.239,29.185)
ZH: P4.B4 U1.12 U1.17 | length 1.6
  Top Layer w0.127: v1(-0.4,19.8) -0.056,20.144 U1.17
ZP: P4.A4 U1.16 | length 1.7
  Top Layer w0.127: U1.16 0.594,20.306 v1(1.125,19.775)
pads on no net: "32 Bit ADC.1" "32 Bit ADC.2" "32 Bit ADC.3" "32 Bit ADC.4" "32 Bit ADC.5" "32 Bit ADC.6" "32 Bit ADC.7" "32 Bit ADC.8" "32 Bit ADC.9" "32 Bit ADC.10" "32 Bit ADC.11" "32 Bit ADC.12" "32 Bit ADC.13" "32 Bit ADC.14" "32 Bit ADC.15" "32 Bit ADC.16" "32 Bit ADC.17" "32 Bit ADC.18" "32 Bit ADC.19" "32 Bit ADC.20" "32 Bit ADC.21" "32 Bit ADC.22" "32 Bit ADC.23" "32 Bit ADC.24" "32 Bit ADC.25" "32 Bit ADC.26" "32 Bit ADC.27" "32 Bit ADC.28" P4. P4.A1 P4.A6 P4.B8 U1.15 U6.5 U6.6 U6.7
copper on no net: | length 40.1
  GND w0.254: 6.691,-48.148 9.79,-45.049 ; 24.894,-63.589 26.191,-62.292 26.191,-28.448

## Polygon pours and split planes (outlines as drawn)
Guard on Top Layer "guard_top" (solid, shelved, pour order 0): 37.234,-11.484 37.234,-54.534 37.234,-71.534 15.184,-71.534 15.184,-54.534 15.184,-11.484
Guard on Bottom Layer "guard_bottom" (solid, shelved, pour order 2): 37.234,-11.484 37.234,-71.534 15.184,-71.534 15.184,-11.484
no net on Guard (split plane): 6.934,34.486 6.934,0.512 5.494,0.512 5.395,0.502 5.299,0.473 5.211,0.426 5.133,0.362 5.07,0.285 5.023,0.197 4.994,0.101 4.984,0.001 4.984,-17.29 -5.095,-17.29 -5.095,0.001 -5.105,0.101 -5.134,0.197 -5.181,0.285 -5.245,0.362 -5.322,0.426 -5.41,0.473 -5.506,0.502 -5.606,0.512 -7.045,0.512 -7.045,34.486
+5 on +5 (split plane): 6.934,34.486 6.934,0.512 5.494,0.512 5.395,0.502 5.299,0.473 5.211,0.426 5.133,0.362 5.07,0.285 5.023,0.197 4.994,0.101 4.984,0.001 4.984,-17.29 -5.095,-17.29 -5.095,0.001 -5.105,0.101 -5.134,0.197 -5.181,0.285 -5.245,0.362 -5.322,0.426 -5.41,0.473 -5.506,0.502 -5.606,0.512 -7.045,0.512 -7.045,34.486

## Silkscreen, mask and mechanical layers (free items; w line width, h text height)
Top Overlay:
  text "Sense  / Plate" at 1.766,26.518 h0.51
  text "Forcing  / Plate" at -5.969,25.248 h0.51
Bottom Overlay:
  text "Beam" at 2.244,27.401 h0.51

## Dimensions
-5.606,-17.8 to -7.556,0.001 on Mechanical 13
-5.613,-17.805 to 5.486,-17.805 on Mechanical 13
-7.556,0.001 to -7.556,34.996 on Mechanical 13
-0.449,-80.411 to 10.651,-80.411 on Mechanical 13
-7.544,35.001 to 7.442,35.001 on Mechanical 13